# Altium PCB H0AR6.PcbDoc (part 2 of 2)
Units mil, origin at the board's own origin, x right, y up, seen from the top; angles counter-clockwise.
Board outline 1363.78 x 1181.1 mil, 2 copper layers (Top Layer, Bottom Layer); 44 components, 26 nets, 125 pads, 28 vias.
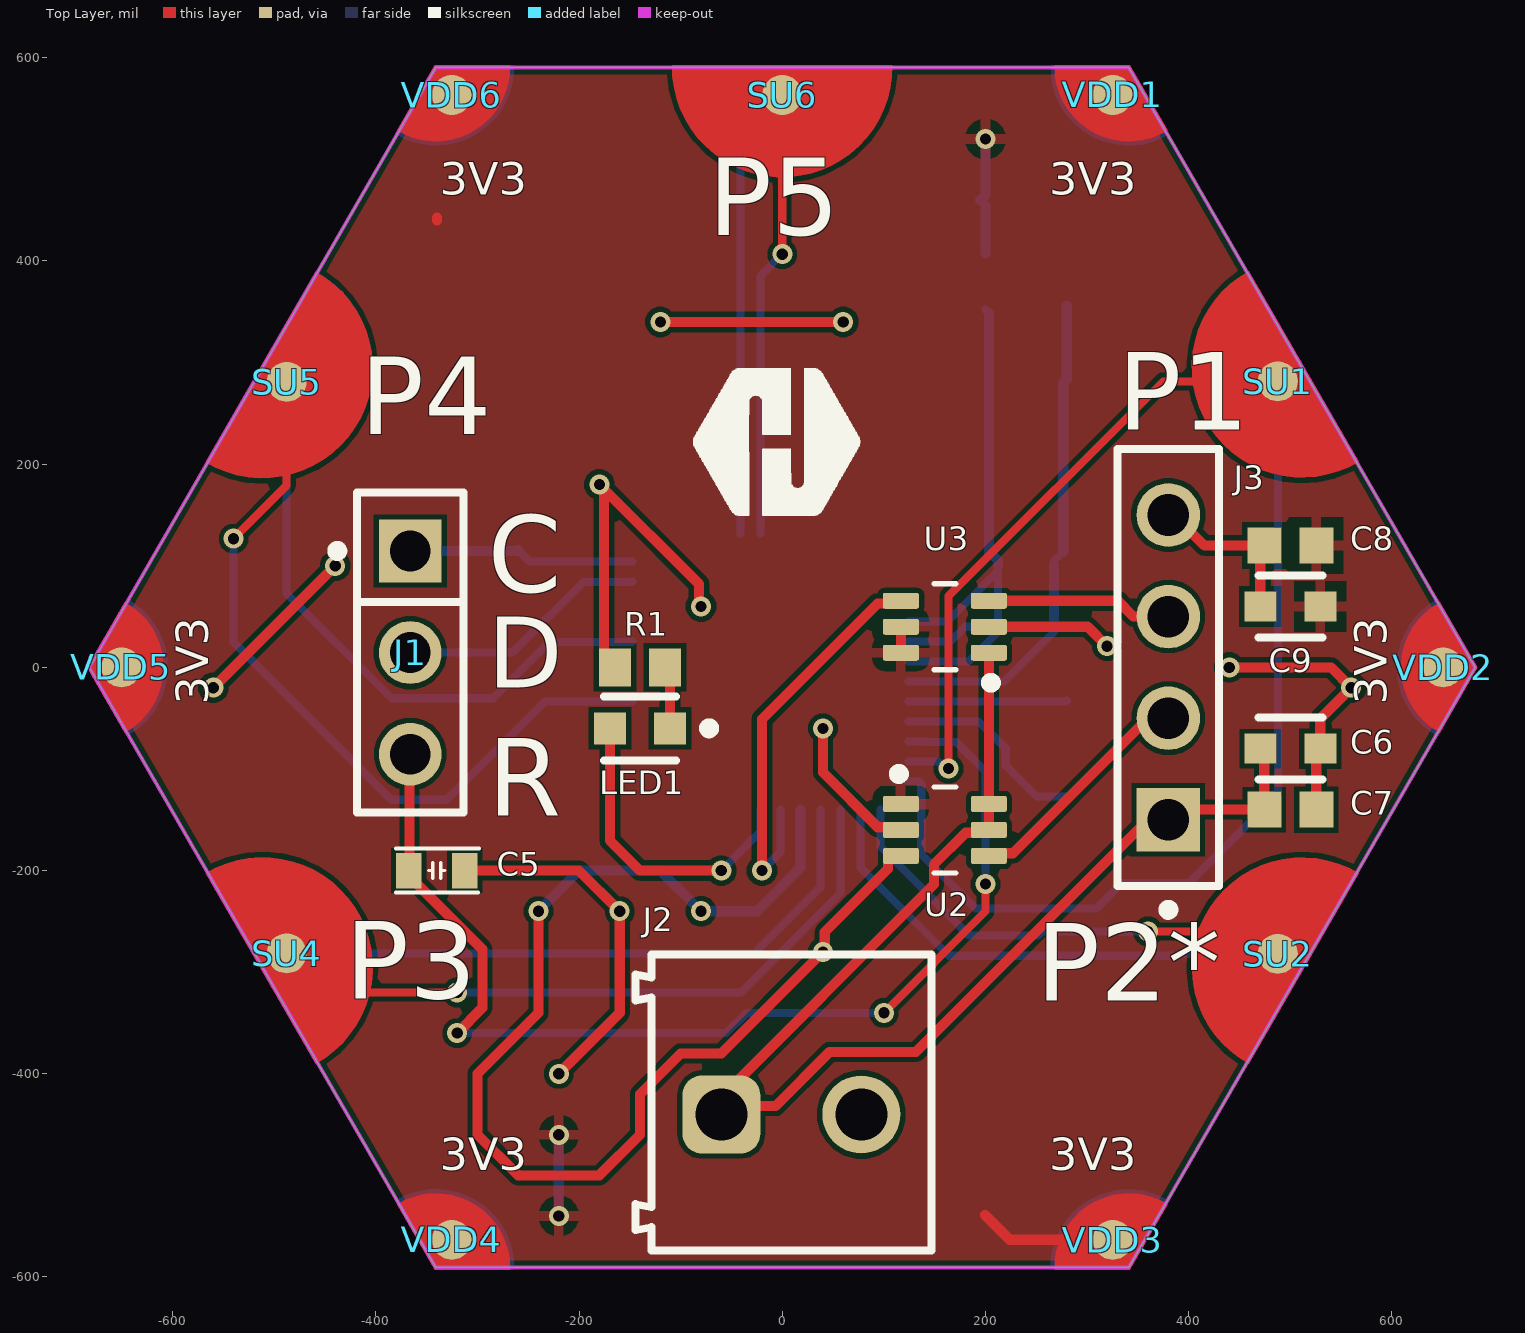
[diagram p0: Top Layer view]

## Part data (continued)
FB1: "Ferrite Beads 0603 30ohms 1500mA Signal Line AEC-Q200", Case Code (Imperial)=0603, Case Code (Metric)=1608, Current Rating=1.5A, DC Resistance (DCR)=50mΩ, Manufacturer=TDK, Manufacturer Lifecycle Status=PRODUCTION, Manufacturer Part Number=MMZ1608Y300BTD25, Max Operating Temperature=125°C, Min Operating Temperature=-55°C, Ratings=AEC-Q200, Supplier Part Number=445-MMZ1608Y300BTD25DKR-ND, Supplier Part Number 1=445-MMZ1608Y300BTA00DKR-ND, Test Frequency=100MHz, Tolerance=25%, Case/Package=0603, Category="Ferrite Beads and Chips", ComponentLink1Description=https://datasheet.octopart.com:443/MMZ1608Y300BTD25-TDK-datasheet-181268448.pdf?src-supplier=IHS, ComponentLink1URL=https://datasheet.octopart.com:443/MMZ1608Y300BTD25-TDK-datasheet-181268448.pdf?src-supplier=IHS, ComponentLink2Description=https://datasheet.octopart.com:443/MMZ1608Y300BTD25-TDK-datasheet-151367874.pdf?src-supplier=TDK, ComponentLink2URL=https://datasheet.octopart.com:443/MMZ1608Y300BTD25-TDK-datasheet-151367874.pdf?src-supplier=TDK, Core Material=Ferrite, ESR=50mΩ, Height=800µm, Impedance=30Ω, Length=1.6mm, Library=Hexabitz, Lifecycle Status=Production, Max Current Rating=1.5A, Max DC Current=1.5A, Max Length=1.75mm, Max Width=950µm, Min Length=1.45mm, Min Width=650µm, Mounting Technology="Surface Mount", Number of Circuits=1, Number of Lines=1, Number of Terminals=2, Packaging="Tape & Reel (TR)", Pricing="1=0.1, 10=0.06, 25=0.052, 50=0.0468, 100=0.0419, 250=0.03612, 500=0.03214, 1000=0.02847 (USD)", REACH SVHC=Yes, RMS Current (Irms)=1.5A, RoHS=Compliant, Stock=11896, Supplier=DigiKey, Supplier 1=Digikey, Termination=SMD/SMT, Weight=2.012816mg, Width=800µm
GND1 GND2 GND3 GND4 GND5 GND6: library part HEXABIT_POWER_PORT_D
J1: library part CMP-02766-001743-1, "CONN HEADER VERT 3POS 2.54MM", Color=Black, Flammability Rating="UL94 V-0", Max Current Rating=7.6A, Max Operating Temperature=125°C, Max Voltage Rating (AC)=550V, Min Operating Temperature=-55°C, Package Quantity=1, Connector Type=Header, Contact Finish - Mating=GOLD, Contact Material=Bronze, Contact Mating Length=0.32inch, Contact Plating=Gold, Contact Shape=Square, Contact Type="Male Pin", Depth=2.54mm, Fastening Type=Pull, Gender=Male, Height=10.67mm, Housing Color=Black, Housing Material=Polyester, Insulation Color=Black, Insulation Material=PBT, Lead Free="Lead Free", Length=7.62mm, Mount="Through Hole", Number of Contacts=3, Number of Positions=3, Number of Rows=1, Orientation=Straight, Packaging=Bulk, Pitch=2.54mm, Radiation Hardening=No, REACH SVHC="No SVHC", RoHS Compliant=Yes, Series=TSW, Termination=Solder, Width=2.54mm
J2: library part CMP-1502-02464-2, Color="Blue, Green", Current=10A, Max Operating Temperature=105°C, Min Operating Temperature=-40°C, Voltage=300V, Contact Material=Brass, Contact Plating="Brass, Tin", Current Rating=10A, Height=8.7mm, Housing Material=Nylon, Lead Pitch=3.5mm, Length=7.4mm, Mount="Through Hole", NexarPartId=18818288, Number of Contacts=2, Number of Levels=1, Number of Pins=2, Number of Positions Per Level=2, Number of Rows=1, Packaging=Box, Pitch=3.5052mm, Plating="Brass, Steel", REACH SVHC=Unknown, RoHS=Compliant, Stripping Length=-6mm, Termination=Screw, Voltage Rating=300V, Width=7.9mm, Wire Gauge (Max)=24AWG, Wire Gauge (Min)=16AWG, Wire/Cable Gauge=24AWG
J3: library part CMP-00575-00296407-1, "SSW-104-02-G-S Board to Board & Mezzanine Connectors Tiger Buy Socket Strip with PCB Tails, .100 Pitch", Color=Black, Contact Resistance=10mΩ, Current Rating=4.7A, Manufacturer=Samtec, Manufacturer Lifecycle Status=PRODUCTION, Manufacturer Part Number=SSW-104-02-G-S, Max Current Rating=6.9A, Max Operating Temperature=125°C, Max Voltage Rating (AC)=550V, Min Operating Temperature=-55°C, Voltage Rating (AC)=465V, Voltage Rating (DC)=655V, Category="Headers and Wire Housings", ComponentLink1Description=https://sigma.octopart.com:443/153594225/technical_drawing/Samtec-SSW-104-02-G-S.pdf?src-supplier=Upverter, ComponentLink1URL=https://sigma.octopart.com:443/153594225/technical_drawing/Samtec-SSW-104-02-G-S.pdf?src-supplier=Upverter, ComponentLink2Description=https://datasheet.octopart.com:443/SSW-104-02-G-S-Samtec-datasheet-153594224.pdf?src-supplier=Upverter, ComponentLink2URL=https://datasheet.octopart.com:443/SSW-104-02-G-S-Samtec-datasheet-153594224.pdf?src-supplier=Upverter, ComponentLink3Description=https://datasheet.octopart.com:443/SSW-104-02-G-S-Samtec-datasheet-97292260.pdf?src-supplier=Samtec, ComponentLink3URL=https://datasheet.octopart.com:443/SSW-104-02-G-S-Samtec-datasheet-97292260.pdf?src-supplier=Samtec, ComponentLink4Description=https://sigma.octopart.com:443/97292261/technical_drawing/Samtec-SSW-104-02-G-S.pdf?src-supplier=Samtec, ComponentLink4URL=https://sigma.octopart.com:443/97292261/technical_drawing/Samtec-SSW-104-02-G-S.pdf?src-supplier=Samtec, ComponentLink5Description=https://datasheet.octopart.com:443/SSW-104-02-G-S-Samtec-datasheet-150000281.pdf?src-supplier=Master+Electronics, ComponentLink5URL=https://datasheet.octopart.com:443/SSW-104-02-G-S-Samtec-datasheet-150000281.pdf?src-supplier=Master+Electronics, ComponentLink6Description=https://datasheet.octopart.com:443/SSW-104-02-G-S-Samtec-datasheet-118235310.pdf?src-supplier=Electro+Sonic, ComponentLink6URL=https://datasheet.octopart.com:443/SSW-104-02-G-S-Samtec-datasheet-118235310.pdf?src-supplier=Electro+Sonic, ComponentLink7Description=https://datasheet.octopart.com:443/SSW-104-02-G-S-Samtec-datasheet-97291133.pdf?src-supplier=Farnell, ComponentLink7URL=https://datasheet.octopart.com:443/SSW-104-02-G-S-Samtec-datasheet-97291133.pdf?src-supplier=Farnell, ComponentLink8Description=https://datasheet.octopart.com:443/SSW-104-02-G-S-Samtec-datasheet-5312073.pdf?src-supplier=Farnell, ComponentLink8URL=https://datasheet.octopart.com:443/SSW-104-02-G-S-Samtec-datasheet-5312073.pdf?src-supplier=Farnell, ComponentLink9Description=https://datasheet.octopart.com:443/SSW-104-02-G-S-Samtec-datasheet-5300226.pdf?src-supplier=Newark, ComponentLink9URL=https://datasheet.octopart.com:443/SSW-104-02-G-S-Samtec-datasheet-5300226.pdf?src-supplier=Newark, ComponentLink10Description=https://datasheet.octopart.com:443/SSW-104-02-G-S-Samtec-datasheet-171398496.pdf?src-supplier=JRH+Electronics, ComponentLink10URL=https://datasheet.octopart.com:443/SSW-104-02-G-S-Samtec-datasheet-171398496.pdf?src-supplier=JRH+Electronics, ComponentLink11Description=https://datasheet.octopart.com:443/SSW-104-02-G-S-Samtec-datasheet-118235309.pdf?src-supplier=Sager+Electronics, ComponentLink11URL=https://datasheet.octopart.com:443/SSW-104-02-G-S-Samtec-datasheet-118235309.pdf?src-supplier=Sager+Electronics, ComponentLink12Description=https://datasheet.octopart.com/SSW-104-02-G-S-Samtec-datasheet-86818373.pdf, ComponentLink12URL=https://datasheet.octopart.com/SSW-104-02-G-S-Samtec-datasheet-86818373.pdf, ComponentLink13Description=https://datasheet.octopart.com/SSW-104-02-G-S-Samtec-datasheet-17059784.pdf, ComponentLink13URL=https://datasheet.octopart.com/SSW-104-02-G-S-Samtec-datasheet-17059784.pdf, ComponentLink14Description=https://datasheet.octopart.com:443/SSW-104-02-G-S-Samtec-datasheet-62331924.pdf?src-supplier=element14+APAC, ComponentLink14URL=https://datasheet.octopart.com:443/SSW-104-02-G-S-Samtec-datasheet-62331924.pdf?src-supplier=element14+APAC, Connector Type="Receptacle, Socket", Contact Material="Bronze, Gold, Nickel", Contact Plating=Gold, Depth=2.41mm, Gender=Receptacle, Height=8.64mm, Housing Color=Black, Housing Material=Polymer, Lead Free="Lead Free", Lead Pitch=2.54mm, Length=10.67mm, Lifecycle Status=Production, Mount="Through Hole", Mounting Technology="Through Hole", NexarPartId=296407, Number of Contacts=4, Number of Positions=4, Number of Rows=1, Orientation=Straight, Packaging=Bulk, Pitch=2.54mm, Pricing="1=1.372, 10=1.365, 30=0.96486, 50=0.95989, 100=0.95491 (USD)", Radiation Hardening=No, REACH SVHC="No SVHC", RoHS=Compliant, Stock=1239, Supplier=Avnet, Supplier Part Number=SSW-104-02-G-S, Termination=Solder, Voltage Rating=550V, Width=2.41mm
LED1: "LED Uni-Color Super Red 639nm 2-Pin Chip 0603(1608Metric) T/R", Case Code (Imperial)=0603, Case Code (Metric)=1608, Color=Red, Forward Current=20mA, Forward Voltage=2V, Manufacturer="Vishay Semiconductors", Max Operating Temperature=85°C, Min Operating Temperature=-35°C, Package Quantity=1, Power Rating=75mW, Supplier Part Number=VLMS1300-GS08DKR-ND, Case/Package=0603, Category=LEDs, ComponentLink1Description=https://datasheet.ciiva.com/26322/vlmo1300-26322153.pdf?src-supplier=Element14, ComponentLink1URL=https://datasheet.ciiva.com/26322/vlmo1300-26322153.pdf?src-supplier=Element14, ComponentLink2Description=https://datasheet.ciiva.com/8028/vlmo1300-8028047.pdf?src-supplier=Element14, ComponentLink2URL=https://datasheet.ciiva.com/8028/vlmo1300-8028047.pdf?src-supplier=Element14, ComponentLink3Description=https://datasheet.ciiva.com/9333/vlmo1300-9333743.pdf?src-supplier=Avnet, ComponentLink3URL=https://datasheet.ciiva.com/9333/vlmo1300-9333743.pdf?src-supplier=Avnet, ComponentLink4Description=https://datasheet.ciiva.com/16510/vlmo1300-16510985.pdf?src-supplier=Future+Electronics, ComponentLink4URL=https://datasheet.ciiva.com/16510/vlmo1300-16510985.pdf?src-supplier=Future+Electronics, ComponentLink5Description=https://datasheet.ciiva.com/2114/vlmo1300-2114930.pdf?src-supplier=Digikey, ComponentLink5URL=https://datasheet.ciiva.com/2114/vlmo1300-2114930.pdf?src-supplier=Digikey, ComponentLink6Description=https://datasheet.ciiva.com/2114/vlmo1300-2114931.pdf?src-supplier=Digikey, ComponentLink6URL=https://datasheet.ciiva.com/2114/vlmo1300-2114931.pdf?src-supplier=Digikey, ComponentLink7Description=https://datasheet.ciiva.com/2114/vlmo1300-2114929.pdf?src-supplier=Digikey, ComponentLink7URL=https://datasheet.ciiva.com/2114/vlmo1300-2114929.pdf?src-supplier=Digikey, Dominant Wavelength=631nm, Height=0.8mm, Illumination Color=Red, Lead Free="Lead Free", Length=1.6mm, Lens Style=Rectangular,Clear, Library=Hexabitz, Luminous Intensity=54mcd, Manufacturer Part Number=VLMS1300-GS08, Mounting Technology="Surface Mount", Number of LEDs=1, Packaging="Tape and Reel", Pricing="1=0.21, 10=0.143, 100=0.0998, 500=0.07982, 1000=0.07322 (USD)", Radiation Hardening=No, Reach SVHC Compliant=Unknown, RoHS=Yes, RoHS Compliant=Yes, Series=CHipLED, Stock=56745, Supplier=Digikey, Supplier 1=Digikey, Supplier Part Number 1=VLMS1300-GS08DKR-ND, Test Current=20mA, Viewing Angle=130°, Wavelength=631nm, Width=0.8mm
R1: library part "generic Resistor", "Res Thick Film 0603 270 Ohm 5% 0.1W(1/10W) ±200ppm/C Pad SMD Automotive T/R", Case Code (Imperial)=0603, Manufacturer=Panasonic, Manufacturer Part Number=ERJ-3GEYJ271V, Max Operating Temperature=155°C, Max Power Dissipation=100mW, Min Operating Temperature=-55°C, Temperature Coefficient=200ppm/°C, Tolerance=5%, Voltage Rating=75V, Case/Package=0603, Category="Chip SMD Resistors", ComponentLink1Description=https://datasheet.octopart.com:443/ERJ-3GEYJ271V-Panasonic-datasheet-13266872.pdf?src-supplier=RS+(Formerly+Allied+Electronics), ComponentLink1URL=https://datasheet.octopart.com:443/ERJ-3GEYJ271V-Panasonic-datasheet-13266872.pdf?src-supplier=RS+(Formerly+Allied+Electronics), ComponentLink2Description=https://datasheet.octopart.com:443/ERJ-3GEYJ271V-Panasonic-datasheet-5314550.pdf?src-supplier=Future+Electronics, ComponentLink2URL=https://datasheet.octopart.com:443/ERJ-3GEYJ271V-Panasonic-datasheet-5314550.pdf?src-supplier=Future+Electronics, ComponentLink3Description=https://datasheet.octopart.com:443/ERJ-3GEYJ271V-Panasonic-datasheet-61114972.pdf?src-supplier=Panasonic+SCT, ComponentLink3URL=https://datasheet.octopart.com:443/ERJ-3GEYJ271V-Panasonic-datasheet-61114972.pdf?src-supplier=Panasonic+SCT, ComponentLink4Description=https://datasheet.octopart.com:443/ERJ-3GEYJ271V-Panasonic-datasheet-147443676.pdf?src-supplier=Master+Electronics, ComponentLink4URL=https://datasheet.octopart.com:443/ERJ-3GEYJ271V-Panasonic-datasheet-147443676.pdf?src-supplier=Master+Electronics, ComponentLink5Description=https://datasheet.octopart.com:443/ERJ-3GEYJ271V-Panasonic-datasheet-10554283.pdf?src-supplier=element14+APAC, ComponentLink5URL=https://datasheet.octopart.com:443/ERJ-3GEYJ271V-Panasonic-datasheet-10554283.pdf?src-supplier=element14+APAC, ComponentLink6Description=https://datasheet.octopart.com:443/ERJ3GEYJ271V-Panasonic-datasheet-165581512.pdf?src-supplier=TME, ComponentLink6URL=https://datasheet.octopart.com:443/ERJ3GEYJ271V-Panasonic-datasheet-165581512.pdf?src-supplier=TME, ComponentLink7Description=https://datasheet.octopart.com:443/ERJ-3GEYJ271V-Panasonic-datasheet-164353788.pdf?src-supplier=Newark, ComponentLink7URL=https://datasheet.octopart.com:443/ERJ-3GEYJ271V-Panasonic-datasheet-164353788.pdf?src-supplier=Newark, ComponentLink8Description=https://datasheet.octopart.com:443/ERJ3GEYJ271V-Panasonic-datasheet-136608608.pdf?src-supplier=Farnell, ComponentLink8URL=https://datasheet.octopart.com:443/ERJ3GEYJ271V-Panasonic-datasheet-136608608.pdf?src-supplier=Farnell, ComponentLink9Description=https://datasheet.octopart.com:443/ERJ-3GEYJ271V-Panasonic---ECG-datasheet-15994758.pdf?src-supplier=Farnell, ComponentLink9URL=https://datasheet.octopart.com:443/ERJ-3GEYJ271V-Panasonic---ECG-datasheet-15994758.pdf?src-supplier=Farnell, ComponentLink10Description=https://datasheet.octopart.com:443/ERJ-3GEYJ271V-Panasonic-datasheet-5313456.pdf?src-supplier=Farnell, ComponentLink10URL=https://datasheet.octopart.com:443/ERJ-3GEYJ271V-Panasonic-datasheet-5313456.pdf?src-supplier=Farnell, ComponentLink11Description=https://datasheet.octopart.com/ERJ-3GEYJ271V-Panasonic-datasheet-78375410.pdf, ComponentLink11URL=https://datasheet.octopart.com/ERJ-3GEYJ271V-Panasonic-datasheet-78375410.pdf, ComponentLink12Description=https://datasheet.octopart.com/Thick-Film-Chip-Resistors-Panasonic-datasheet-family-105.pdf, ComponentLink12URL=https://datasheet.octopart.com/Thick-Film-Chip-Resistors-Panasonic-datasheet-family-105.pdf, ComponentLink13Description=https://datasheet.octopart.com:443/ERJ-3GEYJ271V-Panasonic-datasheet-7538305.pdf?src-supplier=Jameco, ComponentLink13URL=https://datasheet.octopart.com:443/ERJ-3GEYJ271V-Panasonic-datasheet-7538305.pdf?src-supplier=Jameco, ComponentLink14Description=https://datasheet.octopart.com:443/ERJ-3GEYJ271V-Panasonic-datasheet-118655.pdf?src-supplier=DigiKey, ComponentLink14URL=https://datasheet.octopart.com:443/ERJ-3GEYJ271V-Panasonic-datasheet-118655.pdf?src-supplier=DigiKey, ComponentLink15Description=https://datasheet.octopart.com:443/ERJ3GEYJ271V-Panasonic-datasheet-27908757.pdf?src-supplier=Electro+Sonic, ComponentLink15URL=https://datasheet.octopart.com:443/ERJ3GEYJ271V-Panasonic-datasheet-27908757.pdf?src-supplier=Electro+Sonic, ComponentLink16Description=https://datasheet.octopart.com:443/ERJ-3GEYJ271V-Panasonic-datasheet-37173568.pdf?src-supplier=Electro+Sonic, ComponentLink16URL=https://datasheet.octopart.com:443/ERJ-3GEYJ271V-Panasonic-datasheet-37173568.pdf?src-supplier=Electro+Sonic, Composition="Thick Film", Contact Plating=Tin, Depth=800µm, Features="Automotive AEC-Q200", Height=450µm, Lead Free="Lead Free", Length=1.6mm, Library=Hexabitz, Lifecycle Status=Production, Military Standard=Not, Mounting Technology="Surface Mount", Number of Terminals=2, Number of Terminations=2, Packaging="Cut Tape", Power Dissipation=100mW, Power Rating=100mW, Pricing="5000=0.00355, 10000=0.00348, 20000=0.00342, 30000=0.00335, 40000=0.00329 (USD)", Radiation Hardening=No, REACH SVHC=Yes, RoHS=Compliant, Schedule B="8533210045, 8533210045|8533210045|8533210045|8533210045|8533210045|8533210045|8533210045|8533210045|8533210045|8533210045|8533210045|8533210045|8533210045|8533210045|8533210045|8533210045|8533210045|8533210045|8533210045|8533210045|8533210045|8533210045|8533210045|85", Stock=45000, Supplier=Avnet, Supplier Part Number=ERJ-3GEYJ271V, Termination=SMD/SMT, Voltage Rating (DC)=75V, Width=800µm, Working Voltage=75V
R2: library part "generic Resistor", "100mW Thick Film Resistors ±100ppm/℃ ±1% 10kΩ 0603 Chip Resistor - Surface Mount ROHS", Case Code (Imperial)=0603, Manufacturer="Yageo Group", Manufacturer Part Number=RC0603FR-0710KL, Max Operating Temperature=155°C, Min Operating Temperature=-55°C, Power Dissipation=100mW, Supplier Part Number=4023214, Temperature Coefficient=100ppm/°C, Tolerance=1%, Voltage Rating=75V, Voltage Rating (DC)=50V, Case Code (Metric)=0603, Case/Package=0603, Category="Chip SMD Resistors", China RoHS=Non-Compliant, ComponentLink1Description=https://datasheet.octopart.com:443/RC0603FR-0710KL-Yageo-datasheet-175887523.pdf?src-supplier=IHS, ComponentLink1URL=https://datasheet.octopart.com:443/RC0603FR-0710KL-Yageo-datasheet-175887523.pdf?src-supplier=IHS, ComponentLink2Description=https://datasheet.octopart.com:443/RC0603FR-0710KL-Yageo-datasheet-103092701.pdf?src-supplier=Upverter, ComponentLink2URL=https://datasheet.octopart.com:443/RC0603FR-0710KL-Yageo-datasheet-103092701.pdf?src-supplier=Upverter, ComponentLink3Description=https://datasheet.octopart.com:443/RC0603FR-0710KL-Yageo-datasheet-98239111.pdf?src-supplier=Upverter, ComponentLink3URL=https://datasheet.octopart.com:443/RC0603FR-0710KL-Yageo-datasheet-98239111.pdf?src-supplier=Upverter, ComponentLink4Description=https://datasheet.octopart.com:443/RC0603FR-0710KL-Yageo-datasheet-141265859.pdf?src-supplier=Upverter, ComponentLink4URL=https://datasheet.octopart.com:443/RC0603FR-0710KL-Yageo-datasheet-141265859.pdf?src-supplier=Upverter, ComponentLink5Description=https://sigma.octopart.com:443/138820526/technical_drawing/Yageo-RC0603FR-0710KL.pdf?src-supplier=Upverter, ComponentLink5URL=https://sigma.octopart.com:443/138820526/technical_drawing/Yageo-RC0603FR-0710KL.pdf?src-supplier=Upverter, ComponentLink6Description=https://datasheet.octopart.com:443/RC0603FR-0710KL-Yageo-datasheet-8328172.pdf?src-supplier=Farnell, ComponentLink6URL=https://datasheet.octopart.com:443/RC0603FR-0710KL-Yageo-datasheet-8328172.pdf?src-supplier=Farnell, ComponentLink7Description=https://datasheet.octopart.com:443/RC0603FR-0710KL-Yageo-datasheet-13691069.pdf?src-supplier=Farnell, ComponentLink7URL=https://datasheet.octopart.com:443/RC0603FR-0710KL-Yageo-datasheet-13691069.pdf?src-supplier=Farnell, ComponentLink8Description=https://datasheet.octopart.com:443/RC0603FR-0710KL-Yageo-datasheet-62067350.pdf?src-supplier=element14+APAC, ComponentLink8URL=https://datasheet.octopart.com:443/RC0603FR-0710KL-Yageo-datasheet-62067350.pdf?src-supplier=element14+APAC, ComponentLink9Description=https://datasheet.octopart.com:443/RC0603FR-0710KL-Yageo-datasheet-17842380.pdf?src-supplier=element14+APAC, ComponentLink9URL=https://datasheet.octopart.com:443/RC0603FR-0710KL-Yageo-datasheet-17842380.pdf?src-supplier=element14+APAC, ComponentLink10Description=https://datasheet.octopart.com:443/RC0603FR-0710KL-Yageo-datasheet-15599030.pdf?src-supplier=Future+Electronics, ComponentLink10URL=https://datasheet.octopart.com:443/RC0603FR-0710KL-Yageo-datasheet-15599030.pdf?src-supplier=Future+Electronics, ComponentLink11Description=https://datasheet.octopart.com:443/RC0603FR-0710KL-Yageo-datasheet-164759695.pdf?src-supplier=Future+Electronics, ComponentLink11URL=https://datasheet.octopart.com:443/RC0603FR-0710KL-Yageo-datasheet-164759695.pdf?src-supplier=Future+Electronics, ComponentLink12Description=https://datasheet.octopart.com:443/RC0603FR-0710KL-Yageo-datasheet-127823281.pdf?src-supplier=Future+Electronics, ComponentLink12URL=https://datasheet.octopart.com:443/RC0603FR-0710KL-Yageo-datasheet-127823281.pdf?src-supplier=Future+Electronics, ComponentLink13Description=https://datasheet.octopart.com:443/RC0603FR-0710KL-Yageo-datasheet-137700087.pdf?src-supplier=Future+Electronics, ComponentLink13URL=https://datasheet.octopart.com:443/RC0603FR-0710KL-Yageo-datasheet-137700087.pdf?src-supplier=Future+Electronics, ComponentLink14Description=https://datasheet.octopart.com:443/RC0603FR-0710KL-Yageo-datasheet-27584510.pdf?src-supplier=Future+Electronics, ComponentLink14URL=https://datasheet.octopart.com:443/RC0603FR-0710KL-Yageo-datasheet-27584510.pdf?src-supplier=Future+Electronics, ComponentLink15Description=https://datasheet.octopart.com:443/RC0603FR-0710KL-Yageo-datasheet-8324193.pdf?src-supplier=Future+Electronics, ComponentLink15URL=https://datasheet.octopart.com:443/RC0603FR-0710KL-Yageo-datasheet-8324193.pdf?src-supplier=Future+Electronics, ComponentLink16Description=https://datasheet.octopart.com:443/RC0603FR-0710KL-Yageo-datasheet-12596169.pdf?src-supplier=Newark, ComponentLink16URL=https://datasheet.octopart.com:443/RC0603FR-0710KL-Yageo-datasheet-12596169.pdf?src-supplier=Newark, ComponentLink17Description=https://datasheet.octopart.com:443/RC0603FR-0710KL-Yageo-datasheet-503470.pdf?src-supplier=Newark, ComponentLink17URL=https://datasheet.octopart.com:443/RC0603FR-0710KL-Yageo-datasheet-503470.pdf?src-supplier=Newark, ComponentLink18Description=https://datasheet.octopart.com:443/RC0603FR-0710KL-Yageo-datasheet-34211833.pdf?src-supplier=Newark, ComponentLink18URL=https://datasheet.octopart.com:443/RC0603FR-0710KL-Yageo-datasheet-34211833.pdf?src-supplier=Newark, ComponentLink19Description=https://datasheet.octopart.com:443/RC0603FR-0710KL-Yageo-datasheet-79472498.pdf?src-supplier=Megastar, ComponentLink19URL=https://datasheet.octopart.com:443/RC0603FR-0710KL-Yageo-datasheet-79472498.pdf?src-supplier=Megastar, ComponentLink20Description=https://datasheet.octopart.com/RC0603FR-0710KL-Yageo-datasheet-73766026.pdf, ComponentLink20URL=https://datasheet.octopart.com/RC0603FR-0710KL-Yageo-datasheet-73766026.pdf, ComponentLink21Description=https://datasheet.octopart.com:443/RC0603FR-0710KL-Yageo-datasheet-118562.pdf?src-supplier=DigiKey, ComponentLink21URL=https://datasheet.octopart.com:443/RC0603FR-0710KL-Yageo-datasheet-118562.pdf?src-supplier=DigiKey, ComponentLink22Description=http://sigma.octopart.com:80/rohs_statement/Yageo-company-2.pdf?src-supplier=Compliance+Statements, ComponentLink22URL=http://sigma.octopart.com:80/rohs_statement/Yageo-company-2.pdf?src-supplier=Compliance+Statements, ComponentLink23Description=http://sigma.octopart.com:80/conflict_mineral_statement/Yageo-company-3.pdf?src-supplier=Compliance+Statements, ComponentLink23URL=http://sigma.octopart.com:80/conflict_mineral_statement/Yageo-company-3.pdf?src-supplier=Compliance+Statements, Composition="Thick Film", Depth=800µm, Height=450µm, Lead Free="Lead Free", Lead Pitch=300µm, Length=1.6mm, Library=Hexabitz, Lifecycle Status=Production, Military Standard=Not, Mounting Technology="Surface Mount", Number of Terminals=2, Packaging="Tape & Reel", Pins=2, Power Rating=100mW, Pricing="5000=0.001, 25000=0.001, 150000=0.001, 500000=0.0009, 1500000=0.0009 (USD)", REACH SVHC=Yes, RoHS=Compliant, Schedule B="8533210045, 8533210045|8533210045|8533210045|8533210045|8533210045|8533210045|8533210045|8533210045|8533210045|8533210045|8533210045|8533210045|8533210045|8533210045|8533210045|8533210045|8533210045|8533210045|8533210045|8533210045|8533210045|8533210045|8533210045|85", Stock=22990000, Supplier="Future Electronics", Termination=SMD/SMT, Weight=2.012816mg, Width=800µm, Working Voltage=75V
R3: library part "generic Resistor", Library=Hexabitz
SD1 SD2 SD4 SD5 SD6: library part HEXABIT_UART_PORT_D
SU1 SU2 SU4 SU5 SU6: library part HEXABIT_UART_PORT_U
U1: "MCU 32-bit ARM Cortex M0+ RISC 512KB Flash 1.8V/2.5V/3.3V 48-Pin UFQFPN EP Tray", Manufacturer=STMicroelectronics, Supplier Part Number=497-STM32G0B1CEU6-ND, Category=Microcontrollers, Library=Hexabitz, Manufacturer Part Number=STM32G0B1CEU6, Pricing="1=4.78, 10=3.635, 25=3.3488, 100=3.0347, 260=2.87923, 520=2.7899, 1040=2.71638, 2600=2.63877 (USD)", RoHS=Yes, Stock=4305, Supplier=Digikey, Supplier 1=Digikey, Supplier Part Number 1=497-STM32G0B1CEU6-ND
U2 U3: library part CMP-00370-128857311-1, "Single channel fixed-direction level shifter 6-SC70 -40 to 125", Ambient Temperature Range High=125°C, Manufacturer="Texas Instruments", Manufacturer Lifecycle Status=ACTIVE, Max Junction Temperature (Tj)=150°C, Min Operating Temperature=-40°C, Nominal Supply Current=2.5µA, Supplier Part Number=296-TXU0101DCKRCT-ND, Category="Voltage Level Shifters", ComponentLink1Description=https://sigma.octopart.com:443/182282881/technical_drawing/Texas-Instruments-TXU0101DCKR.pdf?src-supplier=Texas+Instruments, ComponentLink1URL=https://sigma.octopart.com:443/182282881/technical_drawing/Texas-Instruments-TXU0101DCKR.pdf?src-supplier=Texas+Instruments, ComponentLink2Description=https://octopart.com:443/opatz8j6/c1?t=a4Hsy8csmqmwz1in6n37KC7Gw8FwFjpVwKbQR1ufDxk4nG-lS8za5dyOG6bCYLFqaMLUjpJXlLnOoy7-d8-hCbclCaMyiT-HFYGyW2llyy_KpI8aMp6M5ydT5AtWJLDEnJbQQ4wzMQxjrbTvuo-7SdgGLrTO_qtWf0OC8_zpQ7QXr6ll_9dfX81jT7ow0bhE0rbz9aXDMi-u9dmU98Q8uDrz6iK3HbcQmZ1D6BOtADI-VNsOi80ZAa8RIhAjPxpQZ1wkz7NqZTRFFFeBTpC-FjVvoBKjFknTR5u0wodEQHr5JfNDvyr9C4fOnA21gZh4xMo2RF1Cz9-DOEkUNj7e3ZfZZ40ZMpPv8_oasMHEedxhTMujYnSwxBgYf1DYko8LvEGtQLkU&src-supplier=Texas+Instruments, ComponentLink2URL=https://octopart.com:443/opatz8j6/c1?t=a4Hsy8csmqmwz1in6n37KC7Gw8FwFjpVwKbQR1ufDxk4nG-lS8za5dyOG6bCYLFqaMLUjpJXlLnOoy7-d8-hCbclCaMyiT-HFYGyW2llyy_KpI8aMp6M5ydT5AtWJLDEnJbQQ4wzMQxjrbTvuo-7SdgGLrTO_qtWf0OC8_zpQ7QXr6ll_9dfX81jT7ow0bhE0rbz9aXDMi-u9dmU98Q8uDrz6iK3HbcQmZ1D6BOtADI-VNsOi80ZAa8RIhAjPxpQZ1wkz7NqZTRFFFeBTpC-FjVvoBKjFknTR5u0wodEQHr5JfNDvyr9C4fOnA21gZh4xMo2RF1Cz9-DOEkUNj7e3ZfZZ40ZMpPv8_oasMHEedxhTMujYnSwxBgYf1DYko8LvEGtQLkU&src-supplier=Texas+Instruments, ComponentLink3Description=https://sigma.octopart.com:443/178868976/technical_drawing/Texas-Instruments-TXU0101DCKR.pdf?src-supplier=Texas+Instruments, ComponentLink3URL=https://sigma.octopart.com:443/178868976/technical_drawing/Texas-Instruments-TXU0101DCKR.pdf?src-supplier=Texas+Instruments, ComponentLink4Description=https://datasheet.octopart.com:443/TXU0101DCKR-Texas-Instruments-datasheet-181199934.pdf?src-supplier=Upverter, ComponentLink4URL=https://datasheet.octopart.com:443/TXU0101DCKR-Texas-Instruments-datasheet-181199934.pdf?src-supplier=Upverter, ComponentLink5Description=http://sigma.octopart.com:80/conflict_mineral_statement/Texas-Instruments-company-63.pdf?src-supplier=Compliance+Statements, ComponentLink5URL=http://sigma.octopart.com:80/conflict_mineral_statement/Texas-Instruments-company-63.pdf?src-supplier=Compliance+Statements, ComponentLink6Description=http://sigma.octopart.com:80/reach_statement/Texas-Instruments-company-64.pdf?src-supplier=Compliance+Statements, ComponentLink6URL=http://sigma.octopart.com:80/reach_statement/Texas-Instruments-company-64.pdf?src-supplier=Compliance+Statements, Data Rate=200Mbps, Height=1.1mm, Length=2mm, Lifecycle Status=Production, Manufacturer Part Number=TXU0101DCKR, Max Operating Temperature=125°C, Number of Bits=1, Number of Circuits=1, Number of Inputs=1, Number of Outputs=1, Number of Pins=6, Pins=6, Pricing="1=0.59, 10=0.416, 25=0.3728, 100=0.3249, 250=0.30208, 500=0.28836, 1000=0.28152 (USD)", Propagation Delay=69ns, RoHS=Compliant, Stock=20319, Supplier=DigiKey, Thickness=900µm, Width=1.25mm
VDD1 VDD2 VDD3 VDD4 VDD5 VDD6: library part HEXABIT_POWER_PORT_U
X1: "Ceramic Resonator 8MHz ±0.5% (Tol) ±0.2% (Stability) 10pF 40Ohm 3-Pin CSMD T/R", Case Code (Imperial)=1206, Case Code (Metric)=3216, Frequency=8MHz, Frequency Stability=0.2%, Frequency Tolerance=0.5%, Load Capacitance=10pF, Manufacturer=Murata, Max Operating Temperature=125°C, Min Operating Temperature=-40°C, Package Quantity=1, Case/Package=1206, Category=Capacitors, Contact Plating=Gold, Height=0.031inch, Impedance=40R, Length=3.2mm, Library=Hexabitz, Manufacturer Part Number=CSTCE8M00G52Z-R0, Mounting Technology="Surface Mount", Packaging="Tape and Reel", Pins=3, RoHS Compliant=Yes, Self Resonant Frequency=8MHz, Series=CERALOCK®, Termination=SMD/SMT, Tolerance=0.5%, Width=1.3mm

## Via types
v1: diameter 19.68, hole 11, Top Layer to Bottom Layer, tented both sides, 28 vias

## Nets (pads, with @x,y where several pads share a name; then routed paths per layer and width w, separated by ;. In a path a pad name is that pad's centre, name@x,y a point inside that pad or via, vN(x,y) a via of type N, cw(c..) or ccw(c..) an arc to the next point about the centre after c; other vN are vias at no path point)
CLK_BOOT: J1.1 R2.1 U1.36 | length 223.6
  Bottom Layer w8: R2.1 -248.7,104.09 U1.36
  Bottom Layer w10: J1.1 -260.82,114.58 R2.1
DATA: J1.2 U1.35 | length 247.5
  Bottom Layer w8: J1.2 -265.42,14.58 -195.81,84.19 -147.78,84.19 U1.35
"ECHO 3V3": U1.18 U3.4 | length 401.5
  Top Layer w10: v1(-20,-200) -20,-51.04 93.92,62.87 113.98,62.87 U3.4
  Bottom Layer w8: v1(-20,-200) -1.89,-181.89 U1.18
"ECHO HC-SR04": J3.3 U3.3 | length 163.2
  Top Layer w10: U3.3 330.18,65.59 345.77,50 J3.3@360,50
"GND HC-SR04": C5.1 C6.2 C7.2 C8.2 C9.2 D1.1 GND1.Pwr_D GND2.Pwr_D GND3.Pwr_D GND4.Pwr_D GND5.Pwr_D GND6.Pwr_D J2.2 J3.4 R1.1 R2.2 R3.1 U1.49 U2.2 U3.2 X1.P$2 | length 1743.6
  Top Layer w10: v1(-560,-20) v1(-440,100) ; C5.1 -200,-200 v1(-160,-240) -160,-340 v1(-220,-400) ; v1(-180,180) -81.85,81.85 -81.85,61.85 v1(-80,60) ; v1@-175.35,172.73 -175.35,10.75 R1.1 ; v1(-120,340) v1(60,340) ; v1(40,-60) 40,-103.37 93.92,-157.28 113.98,-157.28 U2.2 ; U3.2 300.53,40 v1(319.67,20.86) ; J3.4 385.48,150 415.48,120 C8.2 470.47,116.06 C9.2 ; v1(440,0) 540,0 v1(560,-20) 529.53,-50.47 C6.2 525.59,-83.94 C7.2
  Bottom Layer w10: -261.85,481.85 -260,480
Indicator: LED1.2 U1.19 | length 308.1
  Top Layer w10: LED1.2 -169.53,-170.47 -140,-200 v1(-60,-200)
  Bottom Layer w8: v1(-60,-200) -21.57,-161.57 U1.19
NetLED1_1: LED1.1 R1.2 | length 62
  Top Layer w10: R1.2 -110.47,-4.92 LED1.1
NetU1_8: U1.8 X1.P$3 | length 156.3
  Bottom Layer w8: U1.8 279.06,-33.7 X1.P$3
NetU1_9: U1.9 X1.P$1 | length 196.3
  Bottom Layer w8: U1.9 193.39,-53.39 220,-80 220,-96.77 250.47,-127.24 X1.P$1
NRST: C5.2 J1.3 U1.10 | length 1110.9
  Top Layer w8: v1(100,-340) 200,-240 v1(200,-213.31)
  Top Layer w10: J1.3 -366.86,-86.13 -366.86,-199.3 C5.2 -367.56,-204.92 -295.16,-277.32 -295.16,-335.16 v1(-320,-360)
  Bottom Layer w8: v1(-320,-360) -55.37,-360 -35.37,-340 v1(100,-340) ; U1.10 141.97,-73.07 142.19,-73.29 171.05,-73.29 200,-102.24 v1(200,-213.31)
"TRIG 3V3": U1.17 U2.3 | length 1213.9
  Top Layer w10: v1(-240,-240) -240,-340 -300,-400 -300,-460 -260,-500 -180,-500 -140,-460 -140,-420 -100,-380 -60,-380 v1(40,-280) 41.85,-278.15 41.85,-260.43 103.98,-198.31 103.98,-188.46 106.85,-185.59 U2.3
  Bottom Layer w10: v1(-240,-240) -200,-200 -120,-200 v1(-80,-240) -24.87,-240 17.8,-197.34 U1.17
"TRIG HC-SR04": J3.2 U2.4 | length 212.9
  Top Layer w10: U2.4 206.02,-182.87 227.13,-182.87 J3.2@360,-50
UART1_RX: SD5.UART_D U1.32 | length 614.8
  Bottom Layer w8: SD5.UART_D -487.8,72.71 -384.76,-30.33 -284.87,-30.33 -229.41,25.13 -147.78,25.13 U1.32
UART1_TX: SU5.UART_U U1.29 | length 774.6
  Top Layer w8: v1(-540,126.69) -487.8,178.89 SU5.UART_U
  Bottom Layer w8: v1(-540,126.69) -540,24.91 -384.76,-130.33 -330.33,-130.33 -233.7,-33.7 U1.29
UART2_RX: SD2.UART_D U1.14 | length 504.6
  Bottom Layer w8: U1.14 76.85,-196.85 163.84,-283.84 390.74,-283.84 392.69,-281.89 SD2.UART_D
UART2_TX: SU2.UART_U U1.13 | length 474.6
  Top Layer w8: v1(360,-260) 465.9,-260 SU2.UART_U
  Bottom Layer w8: U1.13 96.54,-176.54 183.84,-263.84 251.56,-263.84 255.4,-260 v1(360,-260)
UART4_RX: SD1.UART_D U1.12 | length 908.8
  Bottom Layer w8: U1.12 134.92,-112.44 136.83,-114.35 136.83,-183.85 190.12,-237.15 309.13,-237.15 334.16,-212.12 400.27,-212.12 487.8,-124.6 SD1.UART_D
UART4_TX: SU1.UART_U U1.11 | length 623.8
  Top Layer w8: v1(163.63,-99.59) 163.63,70.15 374.98,281.5 SU1.UART_U
  Bottom Layer w8: U1.11 153.64,-92.76 160.47,-99.59 v1(163.63,-99.59)
UART5_RX: SD6.UART_D U1.41 | length 448.8
  Bottom Layer w8: U1.41 -41.26,522.13 SD6.UART_D
UART5_TX: SU6.UART_U U1.42 | length 440.7
  Top Layer w8: v1(0,406.69) SU6.UART_U
  Bottom Layer w8: U1.42 -21.57,385.12 v1(0,406.69)
UART6_RX: SD4.UART_D U1.16 | length 628.6
  Bottom Layer w8: SD4.UART_D -27.78,-281.5 37.48,-216.24 U1.16
UART6_TX: SU4.UART_U U1.15 | length 683.5
  Top Layer w8: SU4.UART_U -449.3,-320 v1(-320,-320)
  Bottom Layer w8: v1(-320,-320) -40.83,-320 57.17,-222.01 U1.15
"VCC HC-SR04": C6.1 C7.1 J2.1 J3.1 U2.5 U2.6 U3.1 | length 1296.5
  Top Layer w10: U3.1 U2.6 U2.5 200.59,-162.72 180.53,-162.72 149.41,-193.84 149.41,-213.5 -68.9,-431.81 -6.6,-431.81 46.78,-378.43 131.57,-378.43 360,-150 370,-140 C7.1 474.41,-83.94 C6.1
VDD: C8.1 C9.1 D1.2 FB1.1 U2.1 U3.5 U3.6 VDD1.Pwr_U VDD2.Pwr_U VDD3.Pwr_U VDD4.Pwr_U VDD5.Pwr_U VDD6.Pwr_U | length 360.9
  Top Layer w10: -340,440 -340,442.62 ; U3.6 U3.5 ; 199.67,-539.14 223.92,-563.39 VDD3.Pwr_U
  Bottom Layer w8: D1.2 D1.2@200,454.72
  Bottom Layer w10: v1(-220,-540) v1(-220,-460) ; D1.2 195.16,460 200,464.84 v1(200,520) ; FB1.1 D1.2@200,454.72
VDDA: C1.2 C2.1 C3.2 C4.2 FB1.2 U1.4 U1.5 U1.6 | length 621.6
  Bottom Layer w8: U1.6 183.03,5.67 212.44,35.08 C1.2 ; U1.5 165.35,25.35 180,40 C1.2 ; U1.4 162.4,45.04 212.44,95.08 C1.2 ; FB1.2 FB1.2@203.5,348.94
  Bottom Layer w10: FB1.2@203.5,348.94 C4.2 C2.1 203.5,113.86 212.44,104.92 C3.2
VSSA: C1.1 C2.2 C3.1 C4.1 R3.2 U1.7 | length 489.3
  Bottom Layer w8: U1.7 218.46,-14.02 267.56,35.08 C1.1 ; C3.1 267.56,104.92 C3.1@276.5,113.86 ; C4.1 C4.1@280,283.5
  Bottom Layer w10: C1.1 C3.1 ; C3.1@276.5,113.86 C2.2 C4.1 ; C4.1@280,283.5 R3.2
pads on no net: U1.1 U1.2 U1.3 U1.20 U1.21 U1.22 U1.23 U1.24 U1.25 U1.26 U1.27 U1.28 U1.30 U1.31 U1.33 U1.34 U1.37 U1.38 U1.39 U1.40 U1.43 U1.44 U1.45 U1.46 U1.47 U1.48

## Polygon pours and split planes (outlines as drawn)
VDD on Top Layer "VDD_L01_P001" (solid, remove dead copper, pour order 1): -340.94,-590.55 340.94,-590.55 681.89,0 340.94,590.55 -340.94,590.55 -681.89,0
"GND HC-SR04" on Bottom Layer "GND_HC-SR04_L02_P002" (solid, remove dead copper, pour order 2): -340.94,-590.55 340.94,-590.55 681.89,0 340.94,590.55 -340.94,590.55 -681.89,0

## Keep-outs
Keep-Out Layer:
  the board outline again, w3.94

## Silkscreen, mask and mechanical layers (free items; w line width, h text height)
Top Overlay:
  drawing of 1337 lines, arcs and shapes, not listed
  text "3V3" at -337,465.01 h32
  text "3V3" at 263,465.01 h32
  text "P5" at -73.11,425.36 h76
  text "P1" at 330,234.02 h76
  text "P4" at -415.23,229.56 h76
  text "C" at -290,74.02 h76
  text "D" at -290,-19.99 h70
  text "3V3" at -565.01,-37 h32 r90
  text "3V3" at 594.99,-37 h32 r90
  text "R" at -290,-145.98 h76
  text "P3" at -430,-325.98 h76
  text "P2*" at 250,-327.98 h76
  text "3V3" at -337,-494.99 h32
  text "3V3" at 263,-494.99 h32
Bottom Overlay:
  text "GND" at 257,525.01 h32
  text "GND" at -253.7,455.18 h32
  text "P5" at 66.89,425.36 h76
  text "P4" at -310,234.02 h76
  text "P1" at 421,224.02 h76
  text "GND" at -565.01,57 h32 r90
  text "GND" at 594.99,37 h32 r90
  text "H0AR6" at 130,-290 h70
  text "P3" at -270,-325.98 h76
  text "P2*" at 390,-325.98 h76
  text "GND" at -337,-465.01 h32 r180
  text "GND" at 263,-465.01 h32 r180
Top Solder:
  drawing of 20 lines, arcs and shapes, not listed
Dimensions:
  the board outline again, w3.94

## Text inside footprints (layer, text, board x,y; h text height)
C2: Mechanical 32 "1" at 193.5,180 h25 r180; Mechanical 32 "2" at 266.5,180 h25 r180; Mechanical 33 "C40" at 313.5,187.17 h25 r180
C4: Mechanical 32 "2" at 213.5,280 h25; Mechanical 32 "1" at 286.5,280 h25; Mechanical 33 "C40" at 166.5,272.83 h25